# Altium PCB PCB1.PcbDoc
Units mil, origin at the board's own origin, x right, y up, seen from the top; angles counter-clockwise.
Board outline 4565 x 1395 mil, 2 copper layers (Top Layer, Bottom Layer); 27 components, 36 nets, 66 pads, 0 vias.
Unrouted connection lines stored in the file: 32.
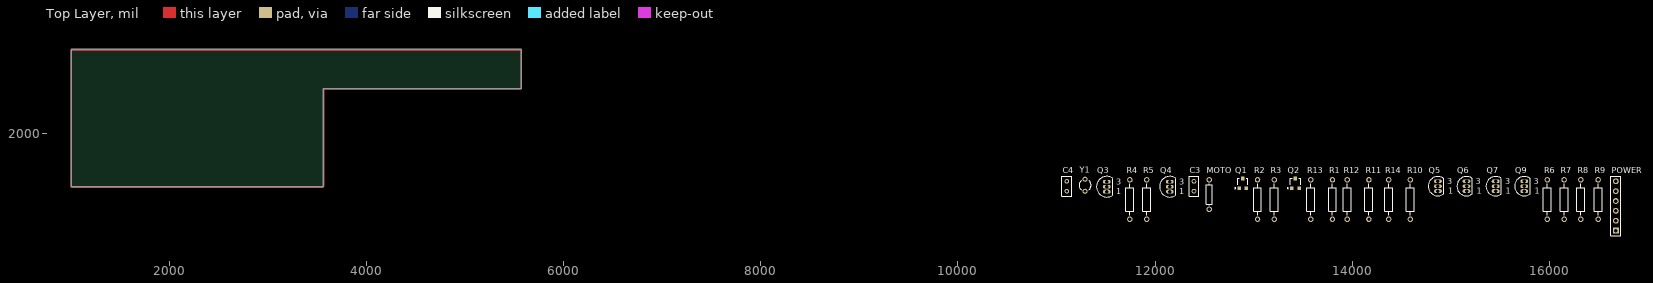
[diagram p0: Top Layer view]
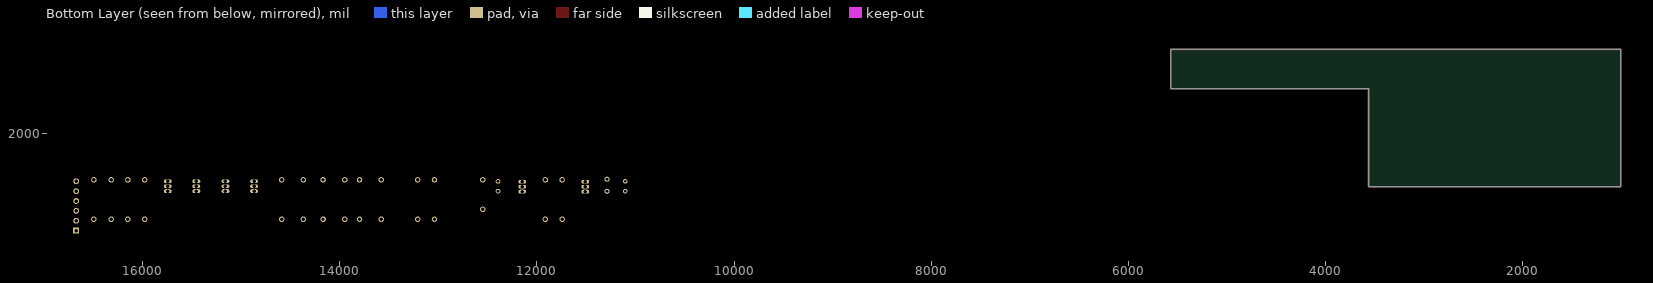
[diagram p1: Bottom Layer view, seen from below]

## Layer stack, top to bottom
Top Layer: signal copper 1.4
Dielectric: dielectric 12.6, FR-4, Dk 4.8
Bottom Layer: signal copper 1.4

## Board outline
1005,2840 1005,1465 3561.89,1465 3561.89,2460 5570,2460 5570,2860 1005,2860

## Design rules (kind name [scope] priority, off if disabled: settings)
Clearance [All] p1: gap=10
ComponentClearance [All] p1: gap=10 collisioncheckmode=0
PolygonConnect [All] p1: connectstyle=Relief reliefconductorwidth=10 reliefentries=4 polygonreliefangle="90 Angle"
RoomDefinition 8051红外遥控控制电路 [InComponentClass('8051红外遥控控制电路')] p1: confinementstyle=ConfineIn formatcopy=TRUE lockcomponents=FALSE outline 0,0 2000,0 2000,1000 0,1000
RoutingVias [All] p1: holewidth=28 width=50 viastyle="Through Hole" minholewidth=28 minwidth=50 maxholewidth=28 maxwidth=50
SolderMaskExpansion [All] p1: expansion=4
TestPointUsage [All] p1: valid=0 allowmultiple=FALSE
Testpoint [All] p1: side=15 testpointundercomponent=TRUE minsize=40 maxsize=100 preferedsize=60 minholesize=0 maxholesize=40 preferedholesize=32 testpointgrid=1 style=1023 order=-539222988
Width [All] p1: maxlimit=10 minlimit=10 preferedwidth=10
17 further rules are at their usual default settings.

## Components (designator, comment, footprint, x,y, rotation, side; value= is the part's Value field where it differs from the comment)
C3 "Cap" RAD-0.1 12395,1470 r90 top
C4 "Cap" RAD-0.1 11105,1470 r90 top
MOTO "Motor" AXIAL-0.3 12550,1385 r90 top
POWER "Header 6" HDR1X6 16675,1020 r90 top
Q1 "8550" SO-G3/C2.5 12890,1500 r0 top
Q2 "8550" SO-G3/C2.5 13425,1500 r0 top
Q3 "8050" BCY-W3 11510,1465 r0 top
Q4 "8050" BCY-W3 12150,1465 r0 top
Q5 "8050" BCY-W3/E4 14870,1470 r0 top
Q6 "8050" BCY-W3/E4 15160,1470 r0 top
Q7 "8050" BCY-W3/E4 15455,1470 r0 top
Q9 "8050" BCY-W3/E4 15745,1470 r0 top
R1 "Res2" AXIAL-0.4 13800,1335 r90 top
R2 "Res2" AXIAL-0.4 13040,1335 r90 top
R3 "Res2" AXIAL-0.4 13210,1335 r90 top
R4 "Res2" AXIAL-0.4 11745,1335 r90 top
R5 "Res2" AXIAL-0.4 11915,1335 r90 top
R6 "Res2" AXIAL-0.4 15980,1335 r90 top
R7 "Res2" AXIAL-0.4 16150,1335 r90 top
R8 "Res2" AXIAL-0.4 16320,1335 r90 top
R9 "Res2" AXIAL-0.4 16495,1335 r90 top
R10 "Res2" AXIAL-0.4 14590,1335 r90 top
R11 "Res2" AXIAL-0.4 14170,1335 r90 top
R12 "Res2" AXIAL-0.4 13950,1335 r90 top
R13 "Res2" AXIAL-0.4 13580,1335 r90 top
R14 "Res2" AXIAL-0.4 14370,1335 r90 top
Y1 "12MHz" BCY-W2/D3.1 11290,1480 r0 top

## Footprints (in the part's own frame and the unit in brackets; to place one, negate y for a bottom-side part, rotate by r counter-clockwise, add the part's x,y. Pads: shape width x height; smd on the part's side, far side on the other; paste and mask are expansions set on the pad)
AXIAL-0.3 [mm] "Resistor; 2 Leads"
  round 1.4 hole 0.85: 1(-3.81,0) 2(3.81,0)
  silkscreen extent -2.77,-0.76 2.77,0.76
AXIAL-0.4 [mm] "Resistor; 2 Leads"
  round 1.4 hole 0.85: 1(-5.08,0) 2(5.08,0)
  silkscreen extent -4.06,-1.02 4.06,1.02
BCY-W2/D3.1 [mm] "Crystal, Thru-Hole; 2 Leads; Body 3.1 x 8.2 mm (Dia.xH)"
  round 1.3 hole 0.7: 1(0,1.55) 2(0,-1.55)
  silkscreen extent -1.55,-1.19 1.55,1.17
BCY-W3 [mm] "TO, Flat Index; 3 In-Line, Axial Leads; Body Dia. 4.8mm"
  oval 2x1 hole 0.9: 1(0,-1.27) 2(0,0) 3(0,1.27)
  silkscreen extent -2.65,-2.65 1.55,2.65
BCY-W3/E4 [mm] "TO, Flat Index; 3 In-Line, Axial Leads; Body Dia. 4.7mm"
  oval 2x1 hole 0.9: 1(0,-1.27) 2(0,0) 3(0,1.27)
  silkscreen extent -2.48,-2.48 1.5,2.48
HDR1X6 [mm] "Connector; Header; 6 Position"
  rect 1.5x1.5 hole 0.9: 1(0,0)
  round 1.5 hole 0.9: 2(2.54,0) 3(5.08,0) 4(7.62,0) 5(10.16,0) 6(12.7,0)
  silkscreen extent -1.27,-1.27 13.97,1.27
RAD-0.1 [mm] "Indicating Instrument; 2 Leads"
  round 1.2 hole 0.7: 1(-1.27,0) 2(1.27,0)
  silkscreen extent -2.54,-1.27 2.54,1.27
SO-G3/C2.5 [mm] "SOT-23; 3 Leads; Body 3.0 x 2.6 mm, inc. leads (LxW max)"
  rect 0.9x0.95 smd: 1(-0.95,-1.25) 2(0.95,-1.25) 3(0,1.25)
  silkscreen extent -2.07,-1.37 1.3,1.25

## Part data
C3 C4: "Capacitor"
MOTO: "Motor, General Kind"
POWER: "Header, 6-Pin"
Q1 Q2: library part PNP, "PNP Bipolar Transistor"
Q3 Q4: library part NPN, "NPN Bipolar Transistor"
Q5 Q6 Q7 Q9: library part 2N3904, "NPN General Purpose Amplifier"
R1 R2 R3 R4 R5 R6 R7 R8 R9 R10 R11 R12 R13 R14: "Resistor"
Y1: library part XTAL, "Crystal Oscillator"

## Nets (pads, with @x,y where several pads share a name; then routed paths per layer and width w, separated by ;. In a path a pad name is that pad's centre, name@x,y a point inside that pad or via, vN(x,y) a via of type N, cw(c..) or ccw(c..) an arc to the next point about the centre after c; other vN are vias at no path point)
C1: POWER.3 Q5.3
C2: POWER.4 Q6.3
C3: POWER.5 Q7.3
C4: POWER.6 Q9.3
COM1: R6.2
COM2: R7.2
COM3: R8.2
COM4: R9.2
GND: C3.1 C4.2 POWER.2 Q3.3 Q4.3 Q5.1 Q6.1 Q7.1 Q9.1 R1.1 R14.2
KEY: 
LED1: R10.1
LED2: R11.1
LED3: R12.1
LED4: R13.1
MOTO1: R2.1
MOTO2: R3.2
NetD1_1: R10.2
NetD2_1: R11.2
NetD3_1: R12.2
NetD4_1: R13.2
NetLED1_2: R14.1
NetMOTO_1: MOTO.1 Q1.1 Q3.1 R5.2
NetMOTO_2: MOTO.2 Q2.1 Q4.1 R4.1
NetQ1_2: Q1.2 R2.2
NetQ2_2: Q2.2 R3.1
NetQ3_2: Q3.2 R4.2
NetQ4_2: Q4.2 R5.1
NetQ5_2: Q5.2 R6.1
NetQ6_2: Q6.2 R7.1
NetQ7_2: Q7.2 R8.1
NetQ9_2: Q9.2 R9.1
R-IN: 
RES: R1.2
VCC: POWER.1 Q1.3 Q2.3
XTAL1: C3.2 Y1.1
XTAL2: C4.1 Y1.2
copper on no net: | length 11914.5
  Top Layer w10: 1005,1460 1005,2850 1015,2850 5560,2850 5570,2860 5570,2465 5565,2460 3570,2460 3570,1475 3555,1460 1010,1460 1005,1465

## Text inside footprints (layer, text, board x,y; h text height)
Q3: Top Overlay "1" at 11605.32,1387.09 h59.05; Top Overlay "3" at 11605.32,1483.39 h59.05
Q4: Top Overlay "1" at 12245.32,1387.09 h59.05; Top Overlay "3" at 12245.32,1483.39 h59.05
Q5: Top Overlay "1" at 14974.72,1395.2 h59.05; Top Overlay "3" at 14965.67,1490.08 h59.05
Q6: Top Overlay "1" at 15264.72,1395.2 h59.05; Top Overlay "3" at 15255.67,1490.08 h59.05
Q7: Top Overlay "1" at 15559.72,1395.2 h59.05; Top Overlay "3" at 15550.67,1490.08 h59.05
Q9: Top Overlay "1" at 15849.72,1395.2 h59.05; Top Overlay "3" at 15840.67,1490.08 h59.05